# EAGLE board motherboard (EAGLE 9.5.2)
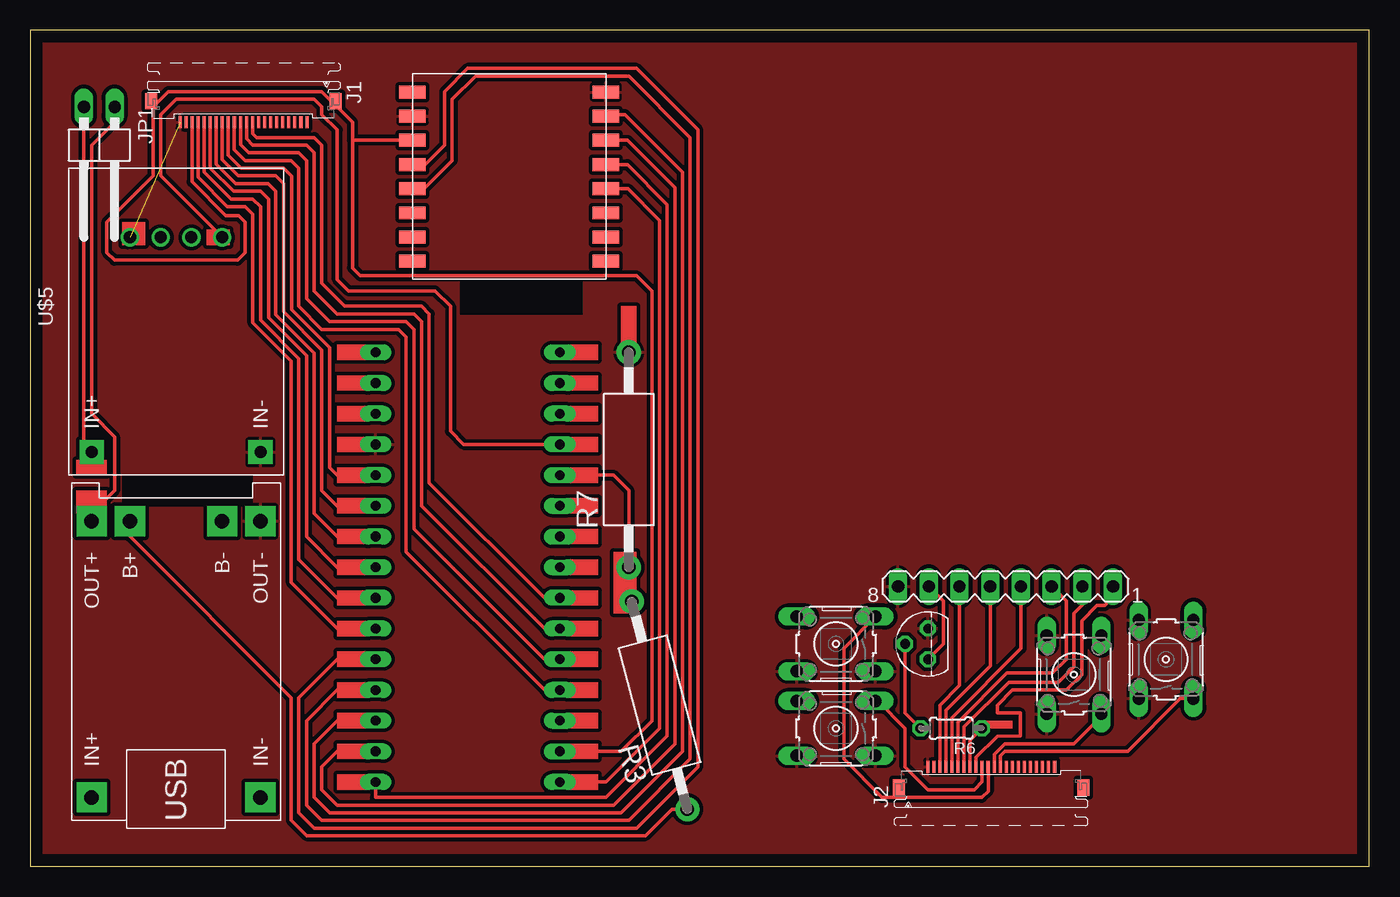
[diagram p0: board, top side]

Size 110.8 x 69.2 mm. Coordinates in mm from the lower left corner, seen from the top.
Outline: 0,0 110.8,0 110.8,69.2 0,69.2 0,0
Copper layers (1*16): Top 0.035mm / dielectric 1.5mm / Bottom 0.035mm
Design rules "default *": minimum track width 6mil, minimum drill 0.35mm, track to track 12mil, track to pad 12mil, pad to pad 12mil, via to via 12mil, smd to smd 6mil, copper to edge 40mil, drill to drill 6mil, minimum pad ring 10mil, minimum via ring 8mil, stop-mask expansion 4mil, vias tented up to drill 0mil, thermal gap 10mil

## Footprints (pad centres in the part's own frame; a part is rotated, then mirrored left to right if it is on the bottom)
NOKIA5110 = drill 1.016 long: 1 -8.31,-18.09; 2 -5.77,-18.09; 3 -3.23,-18.09; 4 -0.69,-18.09; 5 1.85,-18.09; 6 4.39,-18.09; 7 6.93,-18.09; 8 9.47,-18.09
XF2L-2235-1 = smd 1 x 0.25: 1 1.905,5.75; 2 1.905,5.25; 3 1.905,4.75; 4 1.905,4.25; 5 1.905,3.75; 6 1.905,3.25; 7 1.905,2.75; 8 1.905,2.25; 9 1.905,1.75; 10 1.905,1.25; 11 1.905,0.75; 12 1.905,0.25; 13 1.905,-0.25; 14 1.905,-0.75; 15 1.905,-1.25; 16 1.905,-1.75; 17 1.905,-2.25; 18 1.905,-2.75; 19 1.905,-3.25; 20 1.905,-3.75; 21 1.905,-4.25; 22 1.905,-4.75 | smd 1.34 x 1: M1 0.18,8.137; M2 0.18,-7.138
1X02/90 = drill 1.016 long: 1 -1.27,-3.81; 2 1.27,-3.81
AC01 = drill 1.1 pad 2: 1 -8.9,0; 2 8.9,0
0204/5 = drill 0.813 octagon: 1 -2.54,0; 2 2.54,0
B3F-10XX = drill 1.016 long: 1 -3.251,2.261; 2 3.251,2.261; 3 -3.251,-2.261; 4 3.251,-2.261
TO92 = drill 0.813 octagon: 1 1.27,0; 2 0,1.905; 3 -1.27,0
NANO = drill 0.8 long: 3.3V -10.16,24.13; 5V -10.16,-1.27; A0 -10.16,19.05; A1 -10.16,16.51; A2 -10.16,13.97; A3 -10.16,11.43; A4 -10.16,8.89; A5 -10.16,6.35; A6 -10.16,3.81; A7 -10.16,1.27; AREF -10.16,21.59; D2 5.08,1.27; D3 5.08,3.81; D4 5.08,6.35; D5 5.08,8.89; D6 5.08,11.43; D7 5.08,13.97; D8 5.08,16.51; D9 5.08,19.05; D10 5.08,21.59; D11 5.08,24.13; D12 5.08,26.67; D13 -10.16,26.67; GND -10.16,-6.35; GND1 5.08,-1.27; RAW -10.16,-8.89; RST -10.16,-3.81; RST1 5.08,-3.81; RX1 5.08,-6.35; TX0 5.08,-8.89
BATTERY-CHARGER-LI-PROT = drill 1.2 pad 2.5 square: B+ 10.795,3.81; B- 10.795,-3.81; IN+ -12.065,6.985; IN- -12.065,-6.985; OUT+ 10.795,6.985; OUT- 10.795,-6.985
AI-THINKER_RA-01 = smd 2.184 x 1.067: P$1 -8,7; P$2 -8,5; P$3 -8,3; P$4 -8,1; P$5 -8,-1; P$6 -8,-3; P$7 -8,-5; P$8 -8,-7; P$9 8,-7; P$10 8,-5; P$11 8,-3; P$12 8,-1; P$13 8,1; P$14 8,3; P$15 8,5; P$16 8,7
DC-DC-STEP-UP-5V = drill 1: 5V 6.985,-3.81; D+ 6.985,1.27; D- 6.985,-1.27; GND 6.985,3.81 | drill 1 pad 2 square: IN+ -10.795,6.985; IN- -10.795,-6.985

## Placement (x,y rotation side)
DIS2  NOKIA5110  [NOKIA5110]  81.28,5.08 180 top
J1  XF2L-2235-1  [XF2L-2235-1]  17.14,63.5 270 top
J2  XF2L-2235-1  [XF2L-2235-1]  80.01,6.35 90 top
JP1  [1X02/90]  5.72,59.05 180 top
R3  10k  [AC01]  52.07,13.34 105 top
R6  10k  [0204/5]  76.2,11.43 180 top
R7  10k  [AC01]  49.53,33.66 90 top
S1  [B3F-10XX]  66.67,11.43 180 top
S2  [B3F-10XX]  66.67,18.41 180 top
S3  [B3F-10XX]  86.36,15.88 90 top
S4  [B3F-10XX]  93.98,17.14 90 top
T1  BC337  [TO92]  74.3,18.41 90 top
U$1  NANO  [NANO]  33.66,33.66 180 top
U$3  BATTERY-CHARGER-LI-PROT  [BATTERY-CHARGER-LI-PROT]  12.06,17.78 90 top
U$4  AI-THINKER_RA-01  [AI-THINKER_RA-01]  39.62,57.09 0 top
U$5  DC-DC-STEP-UP-5V  [DC-DC-STEP-UP-5V]  12.06,45.09 90 top

## Library data of the parts
DIS2 = _LCD_Nokia5110-minimal
J1 J2 = con-omron; MPN: XF2L-2235-1A; OC_FARNELL: 1430930; OC_NEWARK: 05M2004
JP1 = pinhead
R3 R7 = resistor-power; OC_FARNELL: unknown; OC_NEWARK: unknown
R6 = rcl; SPICEPREFIX: R
S1-S4 = switch-omron; MPN: B3F-1000; OC_FARNELL: 176432; OC_NEWARK: 36M3542
T1 = transistor
U$1 = Arduino-clone-nano-minimal
U$3 = diy-modules
U$4 = lora-ra-02-minimal-because-labels-fuckup-rotating
U$5 = 5v-step-up-minimal

## Nets
+3V3: J1.20 U$1.3.3V U$4.P$3
+5V: U$1.5V U$5.5V
GND: DIS2.8 J1.22 J2.1 R7.2 S1.1 S1.2 S2.1 S2.2 S3.1 S3.2 S4.1 S4.2 T1.1 U$1.GND1 U$3.OUT- U$4.P$2 U$4.P$16 U$5.GND U$5.IN-
N$1: JP1.1 U$3.OUT+
N$2: U$1.D13 U$4.P$12
N$3: J1.19 U$1.D7
N$4: U$1.D12 U$4.P$13
N$5: U$1.D11 U$4.P$14
N$6: U$1.D10 U$4.P$15
N$7: U$1.D9 U$4.P$5
N$8: U$1.D8 U$4.P$4
N$9: J1.14 U$1.D2
N$10: J1.18 U$1.D6
N$11: J1.17 U$1.D5
N$12: J1.16 U$1.D4
N$13: J1.15 U$1.D3
N$14: R6.2 T1.2
N$15: JP1.2 U$5.IN+
N$16: R3.1 U$3.B+
N$17: DIS2.1 J2.9
N$19: J2.8 R6.1
N$20: J2.10 S1.3
N$21: J2.11 S2.3
N$22: J2.12 S3.3
N$23: DIS2.7 T1.3
N$24: R3.2 R7.1 U$1.A7
N$25: DIS2.6 J2.3
N$26: DIS2.5 J2.4
N$27: DIS2.4 J2.5
N$28: DIS2.3 J2.6
N$29: DIS2.2 J2.7
N$30: J2.13 S4.3
N$32: J1.13 U$1.A0
N$33: J1.12 U$1.A1
N$34: J1.11 U$1.A2
N$35: J1.10 U$1.A3

## Tracks (layer width: path | path; a pad name or v marks a point on that pad's centre or on a via)
+3V3
  Top 0.305: U$4.P$3 26.67,60.09 | 26.67,60.09 26.67,61.59 24.13,64.13 11.43,64.13 10.16,62.87 10.16,57.15 6.35,53.34 6.35,50.8 6.99,50.16 17.14,50.16 17.78,50.8 17.78,53.34 17.24,53.88 16.19,53.88 13.39,56.67 J1.20 | 26.67,60.09 26.67,49.53 27.3,48.9 50.16,48.9 51.44,47.62 51.44,12.06 48.9,9.53 U$1.3.3V
+5V
  Top 0.305: U$1.5V 35.88,34.93 34.77,36.04 34.77,46.36 33.5,47.62 26.35,47.62 25.4,48.58 25.4,60.96 24.13,62.23 24.13,62.87 23.49,63.5 12.06,63.5 10.79,62.23 10.79,57.15 U$5.5V
GND  (1 unrouted)
  pour Top: 110.49,69.21 110.49,0 0,0 0,69.21
N$1
  Top 0.305: JP1.1 6.99,61.59 5.08,59.69 5.08,37.47 6.99,35.56 6.99,31.11 5.08,29.21 U$3.OUT+
N$2
  Top 0.305: U$1.D13 47.62,6.99 52.07,11.43 52.07,53.47 49.45,56.09 U$4.P$12
N$3
  Top 0.305: U$1.D7 25.4,19.68 21.59,23.49 21.59,41.82 18.41,44.99 18.41,53.98 17.78,54.61 16.31,54.61 13.89,57.03 J1.19
N$4
  Top 0.305: U$1.D12 28.57,5.71 47.62,5.71 52.71,10.79 52.68,10.82 52.68,54.77 49.42,58.09 U$4.P$13
N$5
  Top 0.305: U$1.D11 25.4,9.53 24.13,8.26 24.13,6.35 25.4,5.08 48.26,5.08 53.34,10.16 53.34,56.19 49.44,60.09 U$4.P$14
N$6
  Top 0.305: U$1.D10 25.4,12.06 23.49,10.16 23.49,5.71 24.76,4.45 48.9,4.45 53.98,9.53 53.98,57.46 49.21,62.23 47.77,62.23 U$4.P$15
N$7
  Top 0.305: U$1.D9 25.4,14.61 22.86,12.06 22.86,5.08 24.13,3.81 49.53,3.81 54.61,8.89 54.61,60.33 49.53,65.41 36.83,65.41 34.93,63.5 34.93,58.42 32.6,56.09 U$4.P$5
N$8
  Top 0.305: U$1.D8 25.4,17.14 22.22,13.97 22.22,4.45 23.49,3.17 50.16,3.17 55.25,8.26 55.25,60.96 50.16,66.04 36.2,66.04 34.29,64.13 34.29,59.69 32.69,58.09 U$4.P$4
N$9
  Top 0.305: U$1.D2 25.4,32.39 24.76,33.02 24.76,42.95 21.61,46.1 21.61,57.12 20.95,57.79 17.46,57.79 16.39,58.85 J1.14
N$10
  Top 0.305: U$1.D6 25.4,22.22 22.22,25.4 22.22,42.04 19.05,45.22 19.05,54.61 18.41,55.25 16.61,55.25 14.39,57.46 J1.18
N$11
  Top 0.305: U$1.D5 25.4,24.76 22.86,27.3 22.86,42.27 19.71,45.42 19.71,55.22 19.05,55.88 16.82,55.88 14.89,57.81 J1.17
N$12
  Top 0.305: U$1.D4 25.4,27.3 23.49,29.21 23.49,42.5 20.32,45.67 20.32,55.88 19.68,56.52 16.99,56.52 15.39,58.12 J1.16
N$13
  Top 0.305: U$1.D3 25.4,29.84 24.13,31.11 24.13,42.73 20.95,45.9 20.95,56.52 20.32,57.15 17.22,57.15 15.89,58.48 J1.15
N$14
  Top 0.305: T1.2 72.39,12.7 R6.2
N$15
  Top 0.305: JP1.2 4.44,34.93 U$5.IN+
N$16
  Top 0.305: U$3.B+ 8.25,27.3 21.59,13.97 21.59,3.81 22.86,2.54 50.91,2.54 53.1,4.74 R3.1
N$17
  Top 0.305: J2.9 78.26,9.03 80.02,10.79 81.91,10.79 81.91,12.7 80.01,12.7 80.01,13.34 81.28,14.61 85.72,14.61 86.99,15.88 86.99,20.32 88.27,21.59 88.9,21.59 89.59,22.28 DIS2.1
N$18
  cutout Top (rank 3): 18.41,29.84 18.41,32.39 7.62,32.39 7.62,29.84
N$19
  Top 0.305: J2.8 77.76,10.45 R6.1
N$20
  Top 0.305: J2.10 78.74,8.23 78.74,6.99 78.1,6.35 74.3,6.35 72.39,8.26 72.39,11.43 70.13,13.69 S1.3
N$21
  Top 0.305: J2.11 79.26,6.24 78.74,5.71 70.48,5.71 67.31,8.89 67.31,18.06 S2.3
N$22
  Top 0.305: J2.12 79.76,9.28 80.64,10.16 86.36,10.16 88.62,12.42 S3.3
N$23
  Top 0.305: T1.3 75.56,18.41 75.56,21.95 DIS2.7
N$24  (2 unrouted)
  Top 0.305: U$1.A7 48.26,32.39 49.53,31.11 R7.1 | R7.1 49.77,24.52 R3.2
N$25
  Top 0.305: J2.3 75.26,13.34 76.89,14.97 DIS2.6
N$26
  Top 0.305: J2.4 75.76,12.93 79.43,16.6 DIS2.5 79.43,21.9
N$27
  Top 0.305: J2.5 76.26,12.32 81.97,18.03 DIS2.4
N$28
  Top 0.305: J2.6 76.76,11.93 80.83,16 84.58,16 85.72,17.14 85.72,21.95 DIS2.3
N$29
  Top 0.305: 87.05,21.9 DIS2.2 87.05,21.64 86.36,20.95 86.36,16.51 85.09,15.24 80.96,15.24 77.26,11.54 J2.7
N$30
  Top 0.305: J2.13 80.26,9.14 80.64,9.53 90.8,9.53 95.17,13.89 S4.3
N$31
  cutout Top (rank 3): 35.56,48.26 35.56,45.72 45.72,45.72 45.72,48.26
N$32
  Top 0.305: U$1.A0 42.55,14.61 31.11,26.04 31.11,43.82 30.48,44.45 24.13,44.45 22.22,46.36 22.22,57.79 21.59,58.42 17.78,58.42 16.89,59.3 J1.13
N$33
  Top 0.305: U$1.A1 42.55,17.14 31.75,27.94 31.75,44.45 31.11,45.09 24.76,45.09 22.86,46.99 22.86,58.42 22.22,59.05 18.09,59.05 17.39,59.75 J1.12
N$34
  Top 0.305: J1.11 17.89,60.21 18.41,59.69 22.86,59.69 23.49,59.05 23.49,47.62 25.4,45.72 31.75,45.72 32.39,45.09 32.39,29.84 42.55,19.68 U$1.A2
N$35
  Top 0.305: U$1.A3 42.55,22.22 33.02,31.75 33.02,45.72 32.39,46.36 26.04,46.36 24.13,48.26 24.13,59.69 23.49,60.33 18.74,60.33 18.41,60.65 18.41,61.58 J1.10
(copper drawn outside any net)
  shapes: Top area x37